# EAGLE board BR110_Roco_43889_Lichtplatine_V3 (EAGLE 5.10)
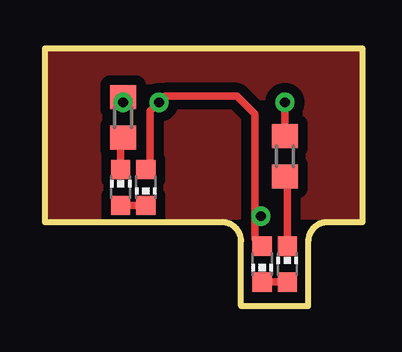
[diagram p0: board, top side]
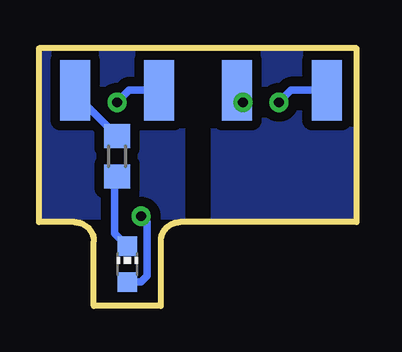
[diagram p1: board, bottom side, seen from below]

No outline drawn. Coordinates in mm, seen from the top.
Copper layers (1*16): Top 0.035mm / dielectric 1.5mm / Bottom 0.035mm
Design rules "default *": minimum track width 7mil, minimum drill 0.4mm, track to track 8mil, track to pad 8mil, pad to pad 8mil, via to via 8mil, smd to smd 8mil, copper to edge 40mil, drill to drill 8mil, minimum pad ring 10mil, minimum via ring 8mil, stop-mask expansion 4mil, vias tented up to drill 0mil, thermal gap 10mil
tKeepout: area 5.1,3.5 to 8.1,7.6; area 0,3.5 to 2.1,9.2; area 11.1,3.5 to 13.2,7.6
bKeepout: area 6.1,3.5 to 7.1,10.8
bRestrict: 1 lines
Milling: 10 lines

## Footprints (pad centres in the part's own frame; a part is rotated, then mirrored left to right if it is on the bottom)
CHIP-LED0603 = smd 0.8 x 0.8: A 0,-0.75; C 0,0.75
SMD1,27-2,54 = smd 1.27 x 2.54: 1 0,0
R0603 = smd 1 x 1.1: 1 -0.85,0; 2 0.85,0

## Placement (x,y rotation side)
AB1  [CHIP-LED0603]  10.1,1.75 0 top
AB2  [CHIP-LED0603]  9.05,1.75 180 top
AB3  [CHIP-LED0603]  9.57,1.75 0 bottom
HI  [SMD1,27-2,54]  1.25,9 180 bottom
PLUS  [SMD1,27-2,54]  5,9 0 bottom
R1  3k6  [R0603]  10,6.25 90 top
R2  6k8  [R0603]  3.25,7.88 90 top
R3  4k7  [R0603]  10,6.25 90 bottom
RU1  [CHIP-LED0603]  3.15,4.95 0 top
RU2  [CHIP-LED0603]  4.2,4.95 180 top
VO  [SMD1,27-2,54]  8.25,9 0 bottom
VOO  [SMD1,27-2,54]  11.75,9 0 bottom

## Library data of the parts
AB1-AB3 RU1 RU2 = led
HI PLUS VO VOO = wirepad
R1-R3 = rcl

## Nets
N$1: AB3.C R3.1
N$2: AB2.A AB3.A PLUS.1 RU2.A
N$3: R1.2 VO.1
N$4: AB1.A AB2.C
N$5: AB1.C R1.1
N$6: RU1.A RU2.C
N$7: R2.1 RU1.C
N$8: R3.2 VOO.1
N$10: HI.1 R2.2

## Tracks (layer width: path | path; a pad name or v marks a point on that pad's centre or on a via)
N$1
  Bottom 0.305: AB3.C 10.1,3.02 10.1,5.3 R3.1
N$2  (via drill 0.4)
  Top 0.305: AB2.A 8.75,2.8 8.75,3.75 | 8.75,3.75 8.75,8 8,8.75 5,8.75 v4.75,8.5 4.38,8.12 4.38,6 RU2.A | 8.75,3.75 v9,3.75
  Bottom 0.305: AB3.A 9,1 8.75,1.25 8.75,3.5 v9,3.75 | PLUS.1 5,8.75 v4.75,8.5
N$3  (via drill 0.4)
  Top 0.305: R1.2 v10,8.5
  Bottom 0.305: VO.1 9.5,9 v10,8.5
N$4
  Top 0.305: AB1.A AB2.C
N$5
  Top 0.305: AB1.C 10.1,5.3 R1.1
N$6
  Top 0.305: RU1.A RU2.C
N$7
  Top 0.305: RU1.C 3.15,6.92 R2.1
N$8
  Bottom 0.305: R3.2 11.75,8.85 VOO.1
N$10  (via drill 0.4)
  Top 0.305: v3.25,8.5 R2.2
  Bottom 0.305: HI.1 2.75,9 v3.25,8.5
N$11
  pour Bottom (isolate 0.406): 0.25,3.75 0.25,10.5 13,10.5 13,3.75
  pour Top (isolate 0.406): 0.25,3.75 0.25,10.5 13,10.5 13,3.75

## Text on the board
tStop: design by Janik Merz | Roco 43889 | BR110
bStop: R | + | W | W | u | o
Document: 0,5mm optimal